# EAGLE board Pigrammer (EAGLE 7.5.0)
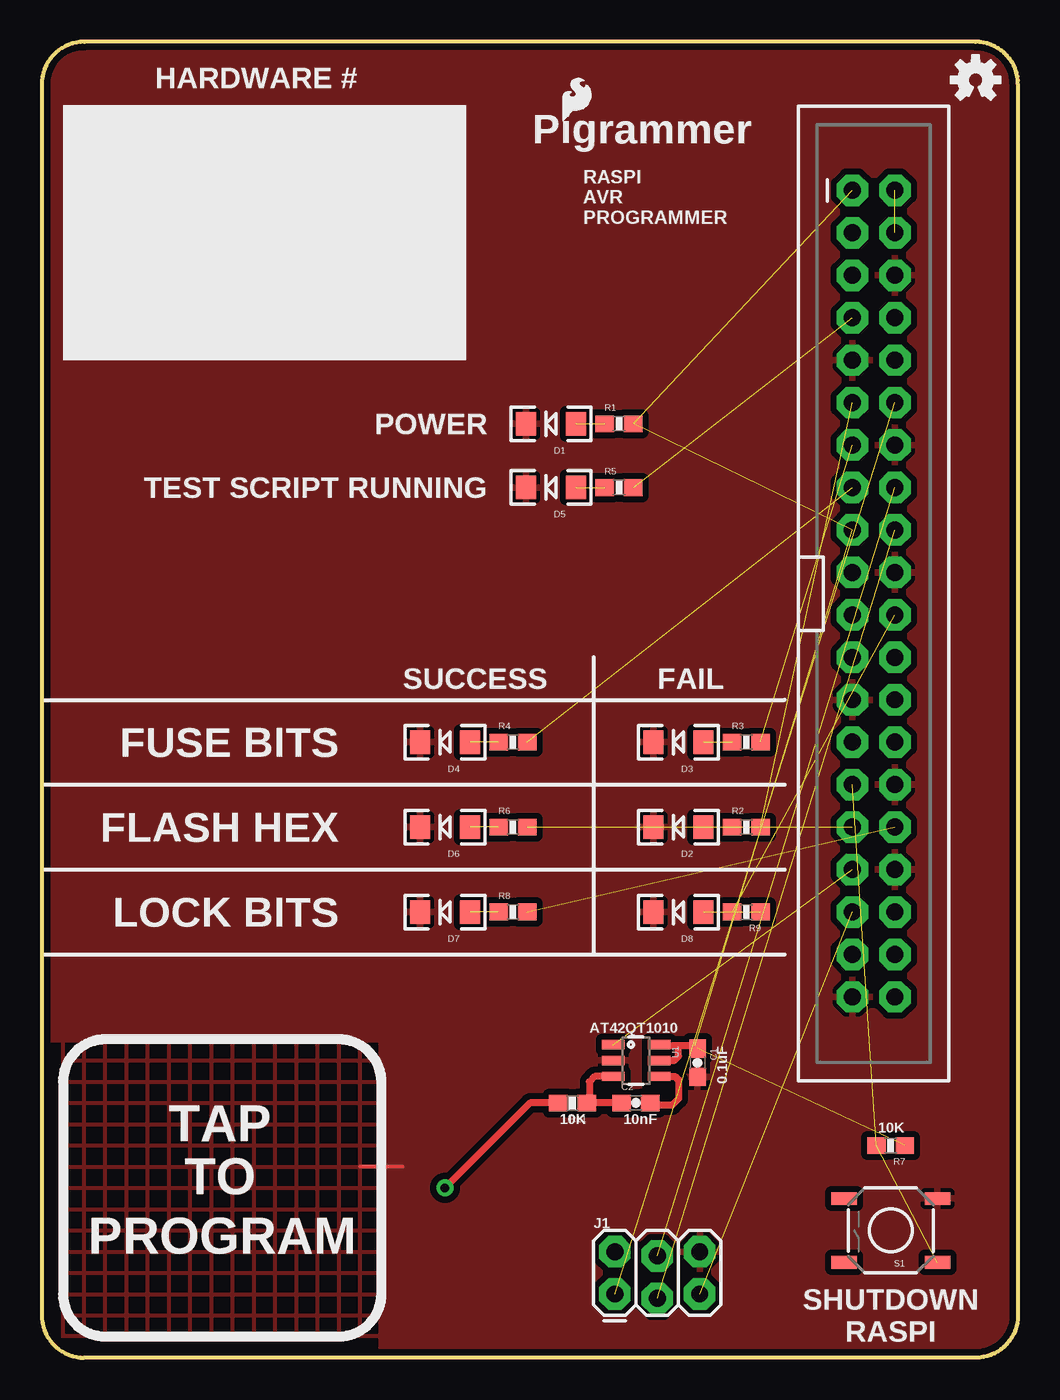
[diagram p0: board, top side]
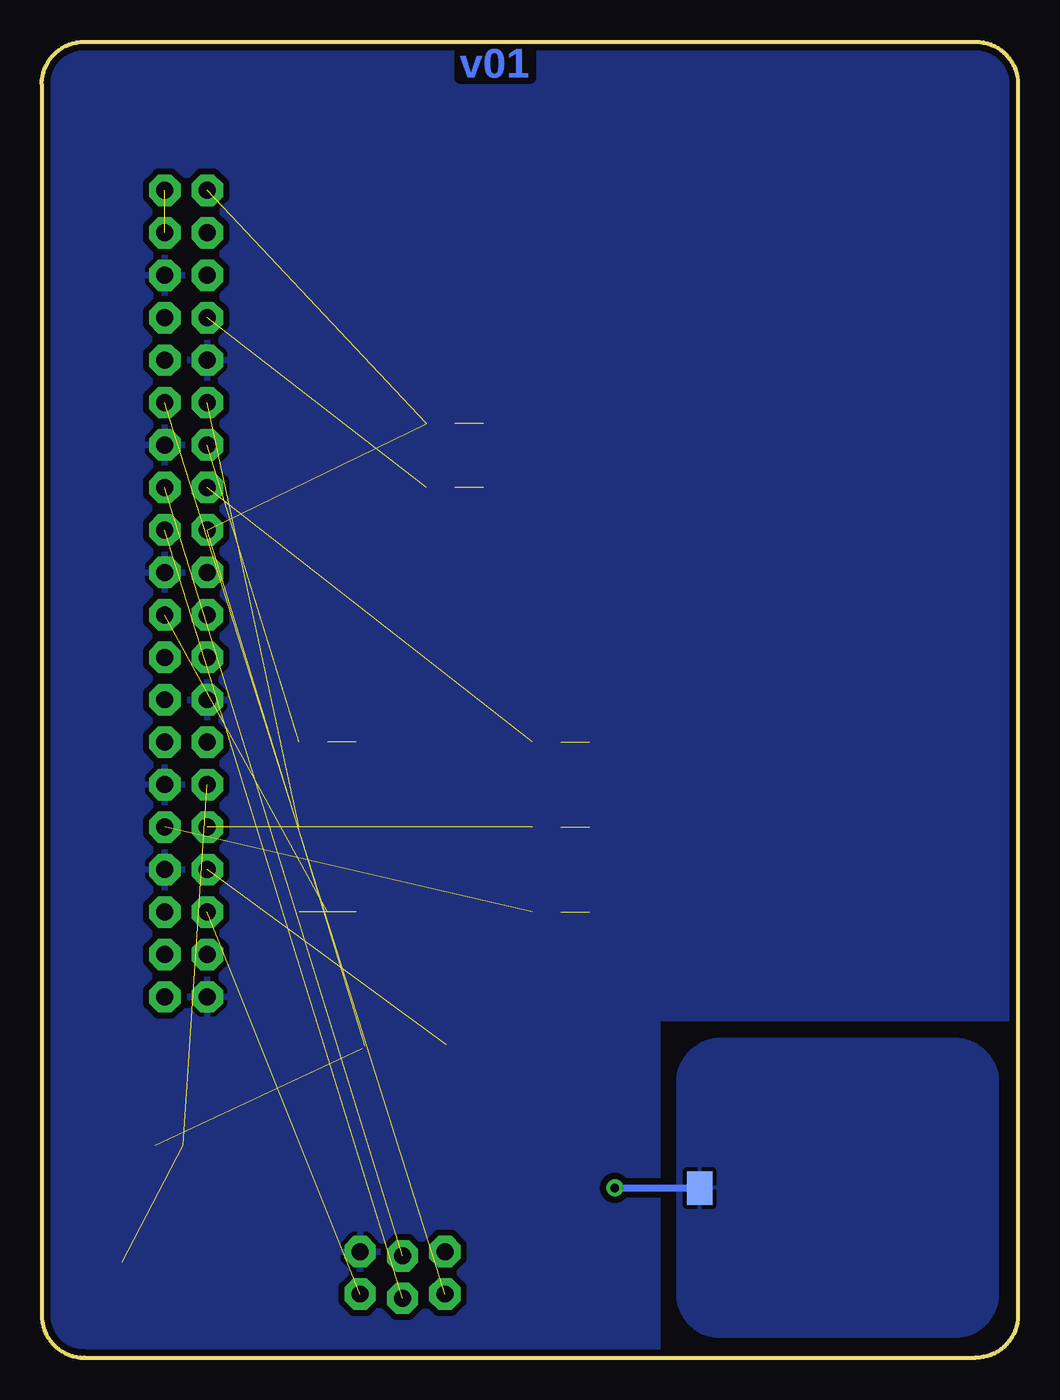
[diagram p1: board, bottom side, seen from below]

Size 58.42 x 78.74 mm. Coordinates in mm from the lower left corner, seen from the top.
Outline: 58.42,76.2 arc90 55.88,78.74 2.54,78.74 arc90 0,76.2 0,2.54 arc90 2.54,0 55.88,0 arc90 58.42,2.54 58.42,76.2
Copper layers (1*16): Top 0.035mm / dielectric 1.5mm / Bottom 0.035mm
Design rules "SparkFun-2-layer *": minimum track width 12mil, minimum drill 20mil, track to track 8mil, track to pad 8mil, pad to pad 8mil, via to via 8mil, smd to smd 8mil, copper to edge 8mil, drill to drill 8mil, minimum pad ring 12mil, minimum via ring 10mil, stop-mask expansion 4mil, vias tented up to drill 20mil, thermal gap 10mil

## Footprints (pad centres in the part's own frame; a part is rotated, then mirrored left to right if it is on the bottom)
0603-CAP = smd 1.1 x 1: 1 -0.85,0; 2 0.85,0
LED-1206 = smd 1.2 x 1.4: A -1.5,0; C 1.5,0
2X3_LOCK = drill 1.016 pad 1.88 octagon: 1 0,0; 2 0,2.54; 3 2.54,-0.254; 4 2.54,2.286; 5 5.08,0; 6 5.08,2.54
2X20-SHROUDED = drill 1.016 pad 1.88 octagon: 1 -1.27,24.13; 2 1.27,24.13; 3 -1.27,21.59; 4 1.27,21.59; 5 -1.27,19.05; 6 1.27,19.05; 7 -1.27,16.51; 8 1.27,16.51; 9 -1.27,13.97; 10 1.27,13.97; 11 -1.27,11.43; 12 1.27,11.43; 13 -1.27,8.89; 14 1.27,8.89; 15 -1.27,6.35; 16 1.27,6.35; 17 -1.27,3.81; 18 1.27,3.81; 19 -1.27,1.27; 20 1.27,1.27; 21 -1.27,-1.27; 22 1.27,-1.27; 23 -1.27,-3.81; 24 1.27,-3.81; 25 -1.27,-6.35; 26 1.27,-6.35; 27 -1.27,-8.89; 28 1.27,-8.89; 29 -1.27,-11.43; 30 1.27,-11.43; 31 -1.27,-13.97; 32 1.27,-13.97; 33 -1.27,-16.51; 34 1.27,-16.51; 35 -1.27,-19.05; 36 1.27,-19.05; 37 -1.27,-21.59; 38 1.27,-21.59; 39 -1.27,-24.13; 40 1.27,-24.13
PAD-1.5X4.5 = smd 1.5 x 2: P$1 0,0
0603-RES@1 = smd 1.1 x 1: 1 -0.85,0; 2 0.85,0
0603-RES = smd 1.1 x 1: 1 -0.85,0; 2 0.85,0
TACTILE-SWITCH-SMD = smd 1.524 x 0.762: 1 -2.794,1.905; 2 2.794,1.905; 3 -2.794,-1.905; 4 2.794,-1.905
SOT23-6 = smd 0.55 x 1.35: 1 -0.95,-1.375; 2 0,-1.375; 3 0.95,-1.375; 4 0.95,1.375; 5 0,1.375; 6 -0.95,1.375

## Placement (x,y rotation side)
C1  0.1uF  [0603-CAP]  39.24,17.65 270 top
C2  10nF  [0603-CAP]  35.56,15.24 0 top
D1  GREEN  [LED-1206]  30.48,55.88 180 top
D2  RED  [LED-1206]  38.1,31.75 180 top
D3  RED  [LED-1206]  38.1,36.83 180 top
D4  GREEN  [LED-1206]  24.13,36.83 180 top
D5  GREEN  [LED-1206]  30.48,52.07 180 top
D6  GREEN  [LED-1206]  24.13,31.75 180 top
D7  GREEN  [LED-1206]  24.13,26.67 180 top
D8  RED  [LED-1206]  38.1,26.67 180 top
J1  [2X3_LOCK]  34.29,3.81 0 top
JP2  RASPBERRYPI-B+-GPIO  [2X20-SHROUDED]  49.78,45.72 0 top
JP9  M01SMD-4.5X1.5  [PAD-1.5X4.5]  19.05,10.16 0 bottom
LOGO1  SFE_LOGO_FLAME.1_INCH  [SFE_LOGO_FLAME_.1]  30.86,73.66 0 top
LOGO2  OSHW-LOGOS  [OSHW-LOGO-S]  55.88,76.45 0 top
R1  1K  [0603-RES@1]  34.54,55.88 0 top
R2  1K  [0603-RES@1]  42.16,31.75 0 top
R3  1K  [0603-RES@1]  42.16,36.83 0 top
R4  1K  [0603-RES@1]  28.19,36.83 0 top
R5  1K  [0603-RES@1]  34.54,52.07 0 top
R6  1K  [0603-RES@1]  28.19,31.75 0 top
R7  10K  [0603-RES@1]  50.8,12.7 180 top
R8  1K  [0603-RES@1]  28.19,26.67 0 top
R9  1K  [0603-RES@1]  42.16,26.67 180 top
R11  10k  [0603-RES]  31.75,15.24 180 top
S1  [TACTILE-SWITCH-SMD]  50.8,7.62 180 top
U1  AT42QT1010SOT23  [SOT23-6]  35.56,17.78 270 top

## Library data of the parts
C1 C2 = SparkFun-Capacitors
D1-D8 = SparkFun-LED
J1 JP9 = SparkFun-Connectors
JP2 = SparkFun-Boards
LOGO1 LOGO2 = SparkFun-Aesthetics
R1-R9 = SparkFun-Resistors; PROD_ID: RES-00818
R11 = SparkFun-Resistors
S1 = SparkFun-Electromechanical; PROD_ID: SWCH-08247
U1 = SparkFun-DigitalIC

## Nets
3.3V: C1.1 JP2.1 JP2.17 R1.2 R7.1 U1.5 U1.6
5V: JP2.2 JP2.4
CAPSENSE: JP2.33 U1.1
CE0: JP2.24
CE1: JP2.26
FLASH_HEX_FAIL: JP2.11 R2.2
FLASH_HEX_PASS: JP2.31 R6.2
FUSE_BITS_FAIL: JP2.13 R3.2
FUSE_BITS_PASS: JP2.15 R4.2
GND: C1.2 D1.C D2.C D3.C D4.C D5.C D6.C D7.C D8.C J1.6 JP2.6 JP2.9 JP2.14 JP2.20 JP2.25 JP2.30 JP2.34 JP2.39 S1.3 U1.2
GP18: J1.1 JP2.12
GP19: J1.5 JP2.35
GP20: JP2.38
GP21: JP2.40
GP23: J1.4 JP2.16
GP24: J1.3 JP2.18
GP26: JP2.37
ID_SC: JP2.28
ID_SD: JP2.27
LOCK_BITS_FAIL: JP2.22 R9.2
LOCK_BITS_PASS: JP2.32 R8.2
MISO: JP2.21
MOSI: JP2.19
N$1: D6.A R6.1
N$2: D1.A R1.1
N$3: D2.A R2.1
N$4: D3.A R3.1
N$5: D7.A R8.1
N$6: D4.A R4.1
N$7: D5.A R5.1
N$8: D8.A R9.1
N$10: C2.2 U1.4
N$11: C2.1 R11.1 U1.3
PAD: JP9.P$1 R11.2
RXI: JP2.10
SCL: JP2.5
SCLK: JP2.23
SCRIPT: JP2.7 R5.2
SDA: JP2.3
SHUTDOWN: JP2.29 R7.2 S1.1
TXO: JP2.8

## Tracks (layer width: path | path; a pad name or v marks a point on that pad's centre or on a via)
3.3V  (4 unrouted)
  Top 0.406: U1.5 37.85,17.78 38.1,18.03 38.1,18.67 | 38.1,18.67 37,18.67 U1.6 | C1.1 39.08,18.67 38.1,18.67
5V  (1 unrouted)
CAPSENSE  (1 unrouted)
FLASH_HEX_FAIL  (1 unrouted)
FLASH_HEX_PASS  (1 unrouted)
FUSE_BITS_FAIL  (1 unrouted)
FUSE_BITS_PASS  (1 unrouted)
GND
  Top 0.254: 21.59,11.43 19.05,11.43
  pour Bottom (isolate 0.381): 0,78.74 58.42,78.74 58.42,0 21.59,0 21.59,20.32 0,20.32
  pour Top (isolate 0.381): 0,78.74 58.42,78.74 58.42,0 20.32,0 20.32,19.05 0,19.05
  pour Top (isolate 0.305, hatched): 20.32,1.27 1.27,1.27 1.27,19.05 20.32,19.05
GP18  (1 unrouted)
GP19  (1 unrouted)
GP23  (1 unrouted)
GP24  (1 unrouted)
LOCK_BITS_FAIL  (1 unrouted)
LOCK_BITS_PASS  (1 unrouted)
N$1  (1 unrouted)
N$2  (1 unrouted)
N$3  (1 unrouted)
N$4  (1 unrouted)
N$5  (1 unrouted)
N$6  (1 unrouted)
N$7  (1 unrouted)
N$8  (1 unrouted)
N$10
  Top 0.406: U1.4 37.91,16.83 38.1,16.64 38.1,15.49 37.72,15.11 36.54,15.11 C2.2
N$11
  Top 0.406: U1.3 33.09,16.83 32.77,16.51 32.77,15.41 R11.1 C2.1
PAD  (via drill 0.51)
  Top 0.406: R11.2 29.21,15.24 v24.13,10.16
  Bottom 0.406: v24.13,10.16 JP9.P$1
  pour Bottom (isolate 0.305): 20.32,16.51 arc90 17.78,19.05 3.81,19.05 arc90 1.27,16.51 1.27,3.81 arc90 3.81,1.27 17.78,1.27 arc90 20.32,3.81
SCRIPT  (1 unrouted)
SHUTDOWN  (2 unrouted)

## Text on the board
Bottom: v01
tPlace: HARDWARE # | Pigrammer | RASPI / AVR / PROGRAMMER | POWER | TEST SCRIPT RUNNING | SUCCESS | FAIL | FUSE BITS | FLASH HEX | LOCK BITS | AT42QT1010 | 0.1uF | 10K | 10nF | TAP | 10K | TO | PROGRAM | SHUTDOWN / RASPI